# Altium PCB PCB_RPi-ASI-POWER-12.pcbdoc
Units mil, origin at the board's own origin, x right, y up, seen from the top; angles counter-clockwise.
Board outline 4700 x 3750 mil, 2 copper layers (Top Layer, Bottom Layer); 74 components, 57 nets, 225 pads, 21 vias.
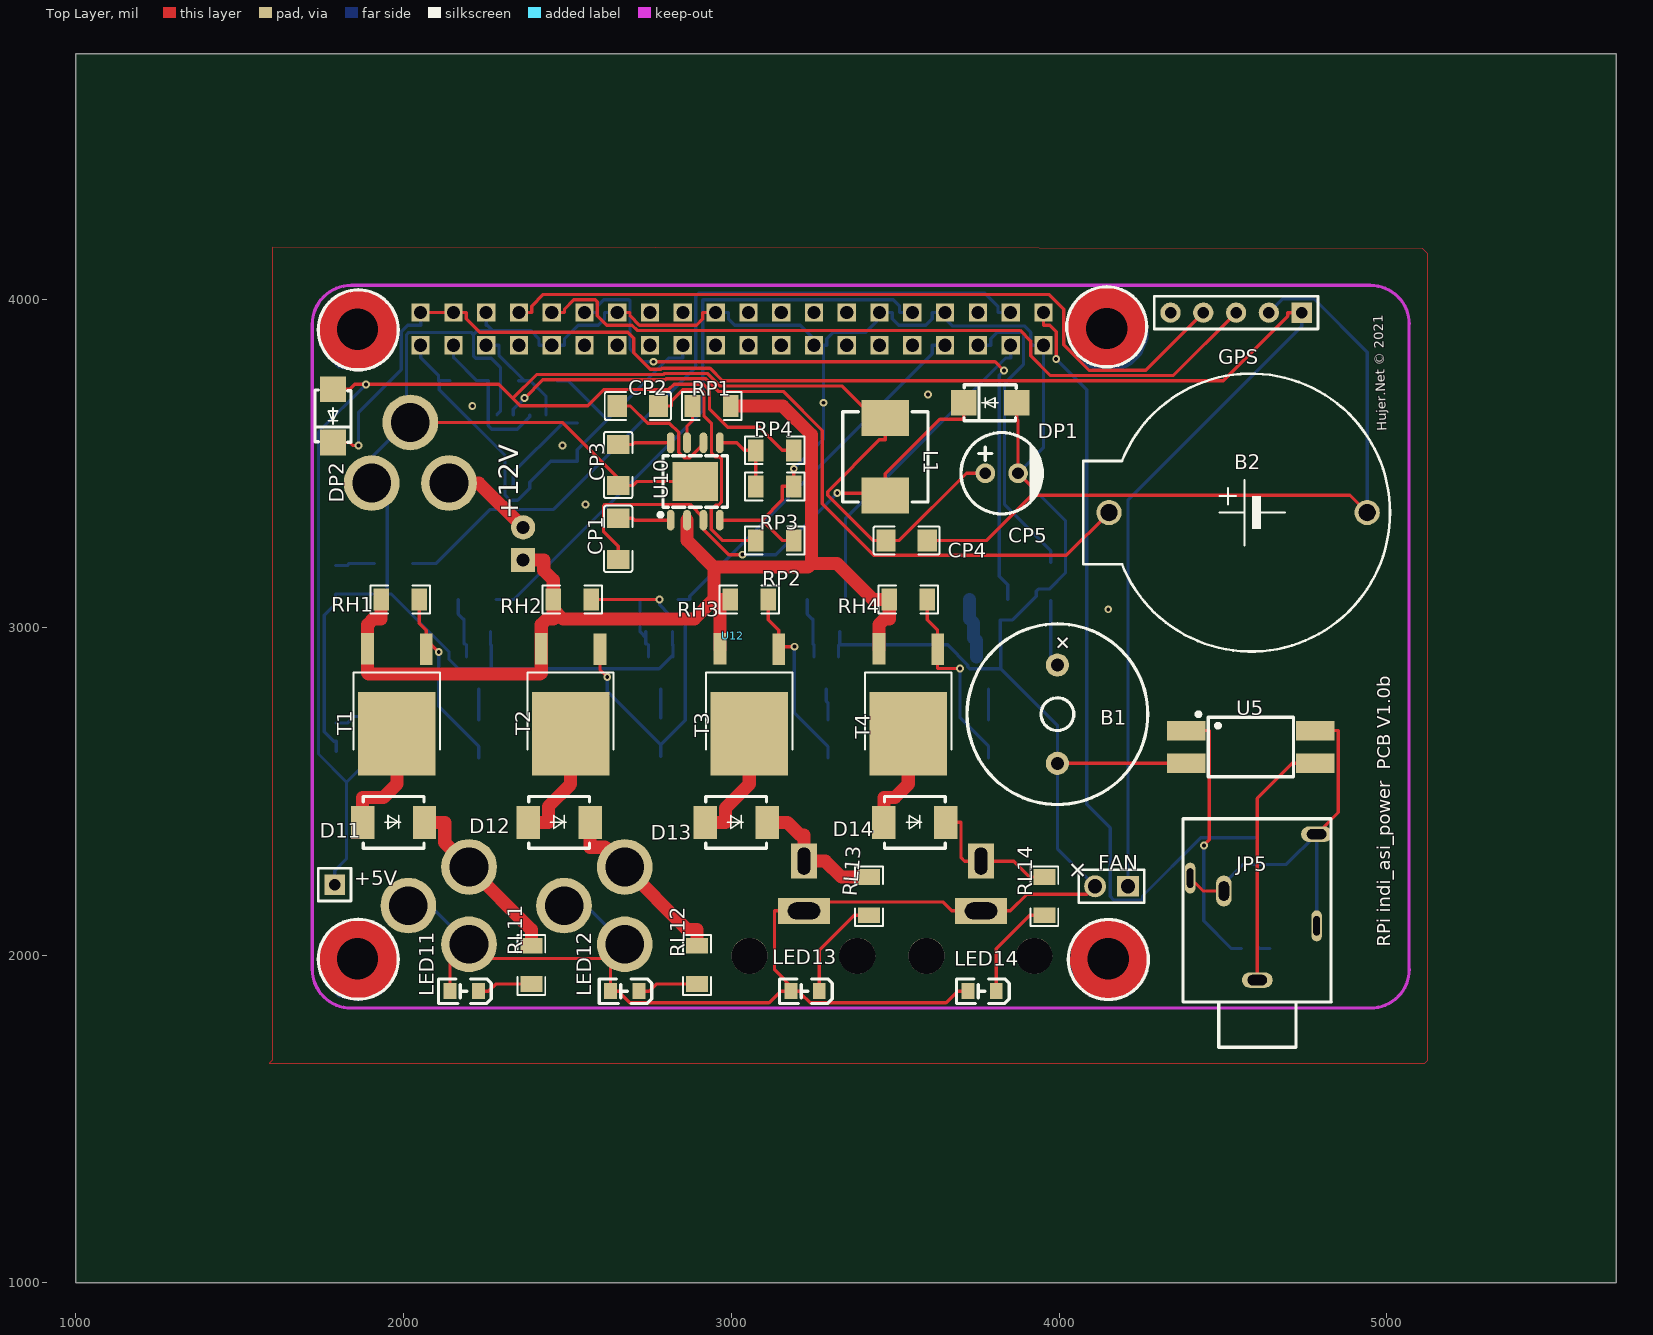
[diagram p0: Top Layer view]
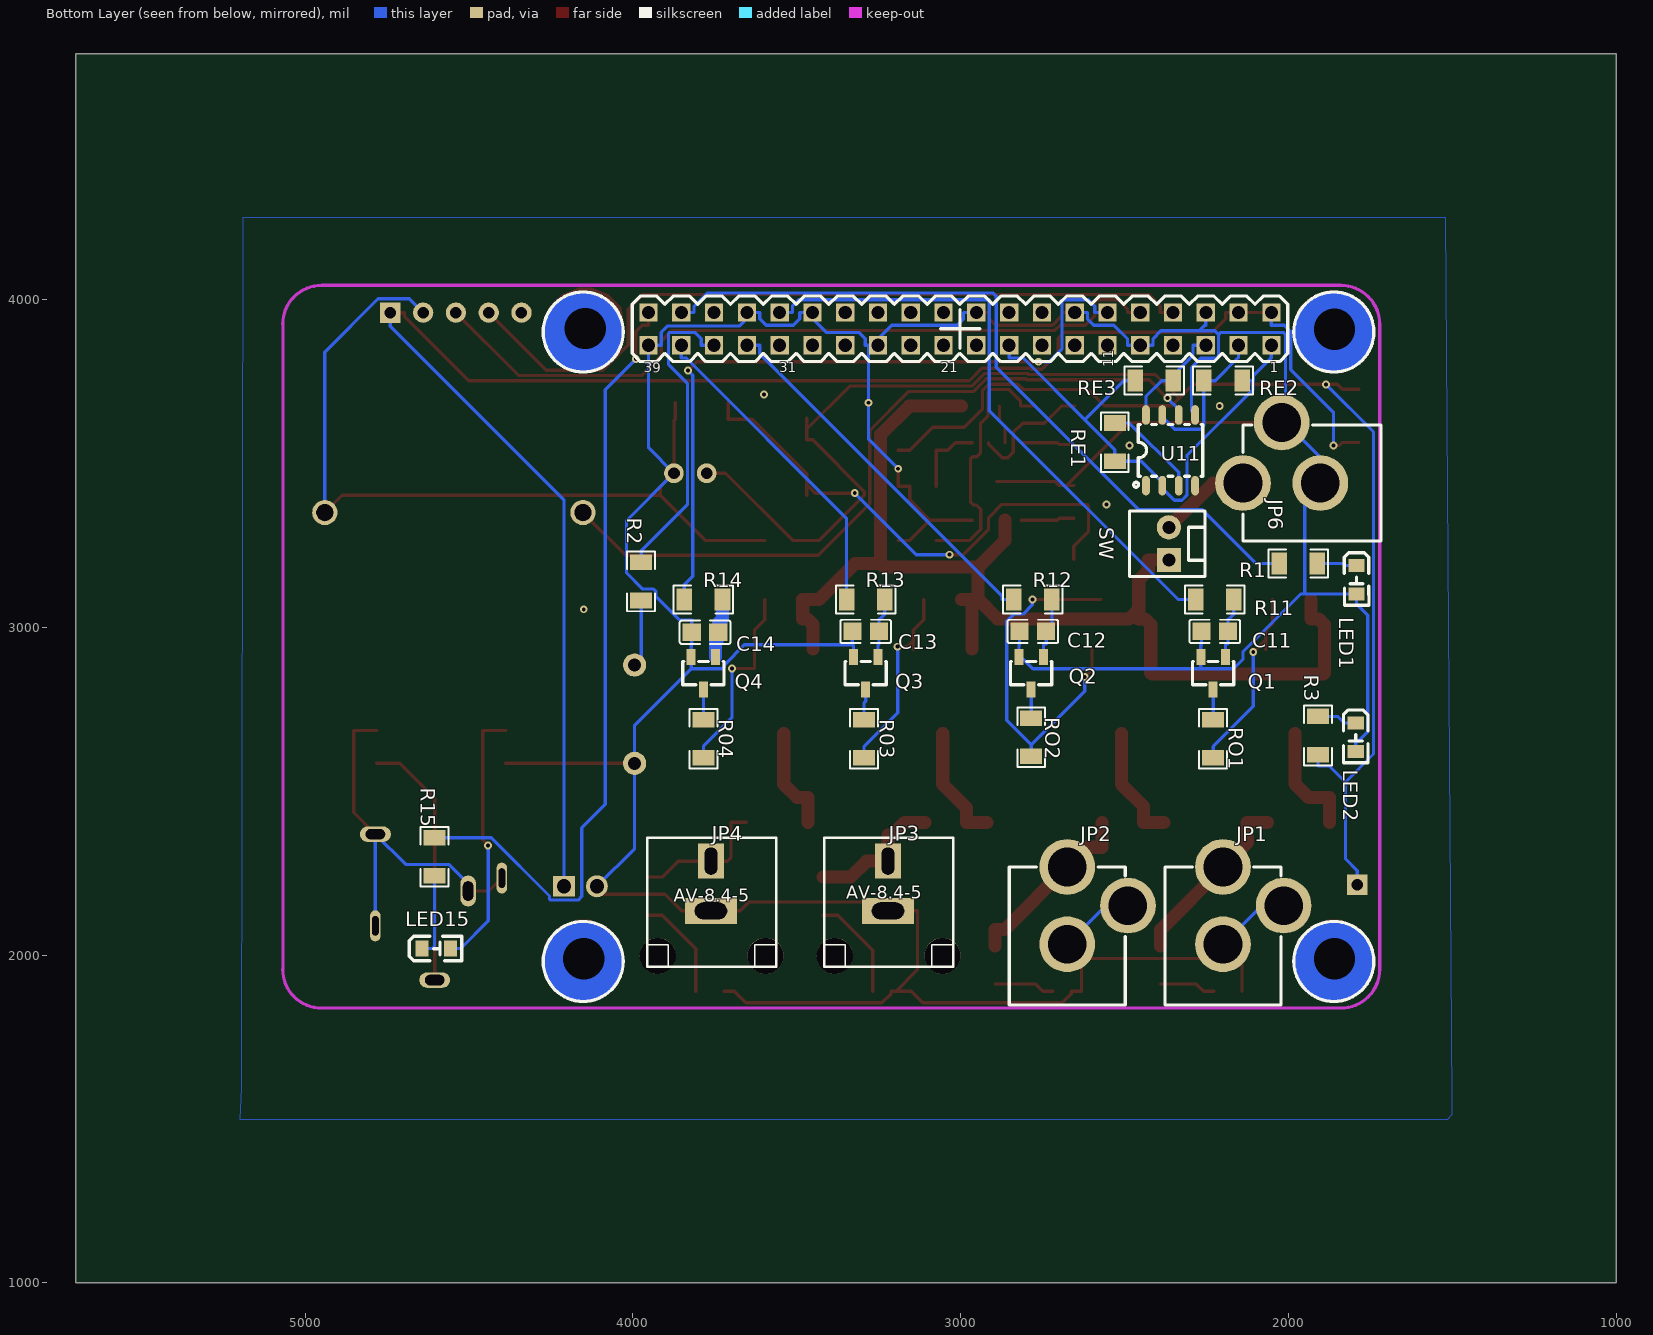
[diagram p1: Bottom Layer view, seen from below]

## Layer stack, top to bottom
Top Layer: signal copper (thickness not stored)
Dielectric: dielectric 12.6, FR-4, Dk 4.8
Bottom Layer: signal copper (thickness not stored)

## Board outline
5700,1000 1000,1000 1000,4750 5700,4750

## Components (designator, comment, footprint, x,y, rotation, side; value= is the part's Value field where it differs from the comment)
+5V "HDR-M-2.54_1x1" HDR-M-2.54_1X1 1790,2215 r0 top
B1 "SFN-1407PA7.6" BUZ-TH_BD14.0-P7.60-D0.7-FD 3995,2735 r270 top
B2 "CR2032-BS-6-1" CR2032 4590,3350 r180 top
C11 "10n" C0805 2225,2987.5 r0 bottom
C12 "10n" C0805 2780,2987.5 r0 bottom
C13 "10n" C0805 3290,2987.5 r0 bottom
C14 "10n" C0805 3780,2985 r0 bottom
CP1 "10n" C1206 2655.01,3270 r90 top
CP2 "3n9" C1206 2715,3675 r180 top
CP3 "100n" C1206 2655,3495 r90 top
CP4 "100n" C1206 3535,3265 r180 top
CP5 "47uF" CAP-D6.3-F2.5 3825,3470 r0 top
D11 "SS54" SMB_L4.6-W3.6-LS5.3-R-RD 1969.97,2405 r180 top
D12 "SS54" SMB_L4.6-W3.6-LS5.3-R-RD 2474.97,2405 r180 top
D13 "SS54" SMB_L4.6-W3.6-LS5.3-R-RD 3014.97,2405 r180 top
D14 "SS54" SMB_L4.6-W3.6-LS5.3-R-RD 3559.97,2405 r180 top
DP1 "SS14_C84343" SMA_L4.3-W2.6-LS5.2-RD 3790,3685 r0 top
DP2 "SS14_C84343" SMA_L4.3-W2.6-LS5.2-RD 1785,3645 r90 top
FAN "Fan" HDR-M-2.54_1X2 4160,2210 r180 top
GPS "GPS" HDR-M-2.54_1X5 4540,3960 r180 top
JP1 "POWER_JACKPTH" POWER_JACK_PTH 2200,1730 r0 bottom
JP2 "POWER_JACKPTH" POWER_JACK_PTH 2675,1730 r0 bottom
JP3 "RCA" AV-8.4-5 3420,1961.78 r0 bottom
JP4 "RCA" AV-8.4-5 3960,1961.78 r0 bottom
JP5 "3.5mm jack Camera Shot Port" AUDIO-PJ324 4400,2235 r180 top
JP6 "POWER_JACKPTH" POWER_JACK_PTH 1600,3440 r270 bottom
L1 "10uH" IND-SMD_L7.0-W6.6 3470.05,3520 r270 top
LED1 "Camera" LED0805-RD#1 1792.53,3145 r90 bottom
LED2 "Camera" LED0805-RD#1 1795.03,2665 r90 bottom
LED11 "LED-TH-3mm_R" LED0805-RD#2 2185.03,1890 r180 top
LED12 "LED-TH-3mm_R" LED0805-RD#2 2675.03,1890 r180 top
LED13 "LED-TH-3mm_R" LED0805-RD#2 3225.03,1890 r180 top
LED14 "LED-TH-3mm_R" LED0805-RD#2 3765.03,1890 r180 top
LED15 "Camera" LED0805-RD#1 4600.03,2020 r0 bottom
Q1 "MMBT2222A-1P" SOT-23-3_L3.0-W1.7-P0.95-LS2.9-BR 2230,2860 r270 bottom
Q2 "MMBT2222A-1P" SOT-23-3_L3.0-W1.7-P0.95-LS2.9-BR 2785,2860 r270 bottom
Q3 "MMBT2222A-1P" SOT-23-3_L3.0-W1.7-P0.95-LS2.9-BR 3290,2860 r270 bottom
Q4 "MMBT2222A-1P" SOT-23-3_L3.0-W1.7-P0.95-LS2.9-BR 3785,2860 r270 bottom
R1 "2k2" R1206#1 1970,3195 r180 bottom
R2 "100" R1206#1 3975,3140 r90 bottom
R03 "100" R1206#1 3295,2660 r90 bottom
R3 "2k2" R1206#1 1910,2670 r90 bottom
R04 "100" R1206#1 3785,2660 r90 bottom
R11 "1k" R1206#1 2225,3085 r0 bottom
R12 "1k" R1206#1 2780,3085 r0 bottom
R13 "1k" R1206#1 3290,3085 r0 bottom
R14 "1k" R1206#1 3785,3085 r0 bottom
R15 "220" R1206#1 4605,2300 r270 bottom
RE1 "4k7" R1206#1 2530,3565 r90 bottom
RE2 "4k7" R1206#1 2200,3752.5 r0 bottom
RE3 "4k7" R1206#1 2410,3752.5 r180 bottom
RH1 "10k" R1206#2 1990,3085 r180 top
RH2 "10k" R1206#2 2515,3085 r180 top
RH3 "10k" R1206#2 3055,3085 r180 top
RH4 "10k" R1206#2 3540,3085 r180 top
RL11 "22k" R1206#2 2390,1970 r90 top
RL12 "22k" R1206#2 2895,1970 r90 top
RL13 "22k" R1206#2 3420,2180 r90 top
RL14 "22k" R1206#2 3955,2180 r90 top
RO1 "100" R1206#1 2230,2660 r90 bottom
RO2 "100" R1206#1 2785,2665 r90 bottom
RP1 "100k" R1206#2 2940,3675 r0 top
RP2 "6k8" R1206#2 3132.5,3265 r180 top
RP3 "10k" R1206#2 3132.5,3430 r180 top
RP4 "47k" R1206#2 3132.5,3540 r0 top
SW "MOLEX KK 1X2" "MOLEX KK 1X2" 2365,3205 r270 bottom
T1 "NPD22P04" TO-252-2_L6.6-W6.1-P4.57-LS9.9-TL-CW_A 1979.96,2805.04 r270 top
T2 "NPD22P04" TO-252-2_L6.6-W6.1-P4.57-LS9.9-TL-CW_A 2509.96,2805.04 r270 top
T3 "NPD22P04" TO-252-2_L6.6-W6.1-P4.57-LS9.9-TL-CW_A 3054.96,2805.04 r270 top
T4 "NPD22P04" TO-252-2_L6.6-W6.1-P4.57-LS9.9-TL-CW_A 3539.96,2805.04 r270 top
U5 "PC817SC" OPTO-SMD-4_L4.6-W6.5-P2.54-LS10.3-TL 4585,2635 r0 top
U10 "MP2307DN-LF-Z" SOP-8_L4.9-W3.9-P1.27-LS6.0-BL-EP 2890,3445 r0 top
U11 "DS3231MZ+" SOIC-8_L4.9-W3.9-P1.27-LS6.0-BL 2360,3540 r0 bottom
U12 "RaspberryPi 3" "RPI3/4 GPIO" 3005,2975 r0 top

## Footprints (in the part's own frame and the unit in brackets; to place one, negate y for a bottom-side part, rotate by r counter-clockwise, add the part's x,y. Pads: shape width x height; smd on the part's side, far side on the other; paste and mask are expansions set on the pad)
AUDIO-PJ324 [mm]
  oval 2.4x1.2 hole 0.8 slot 1.5 at 0 deg: 1(-5.2,7.9) 4(-9.797,-3.399)
  oval 0.8x2.4 hole 0.5 slot 1.5 at 90 deg: 2(0,0) 5(-9.8,3.699)
  oval 1.2x2.4 hole 0.8 slot 1.5 at 90 deg: 3(-2.609,1.001)
  silkscreen extent -10.94,-4.6 0.56,13.1
AV-8.4-5 [mm]
  rect 2x2.7 hole 1 slot 2.1 at 90 deg: 1(-5.032,-8.255)
  rect 4x2 hole 1.3 slot 2.5 at 0 deg: 2(-5.032,-4.4)
  round 2.8 hole 2.8 unplated: ""(-9.255,-0.914) ""(-0.905,-0.914)
  silkscreen extent -10.08,-10.06 -0.08,-0.06
BUZ-TH_BD14.0-P7.60-D0.7-FD [mm]
  round 1.8 hole 1: 1(-3.81,0) 2(3.81,0)
  silkscreen extent -7,-7 7,7
C0805 [mm]
  rect 1.41x1.35 smd: 1(1.03,0) 2(-1.03,0)
  silkscreen extent -1.96,-0.9 1.96,0.9
C1206 [mm]
  rect 1.485x1.728 smd: 1(-1.593,0) 2(1.593,0)
  silkscreen extent -2.56,-1.09 2.56,1.09
CAP-D6.3-F2.5 [mil]
  round 60 hole 36: 1(-50,0) 2(50,0)
  silkscreen extent -124,-124 125,124
CR2032 [mil]
  round 76.77 hole 51.18 slot 51.38 at 90 deg: +(437.4,0) -(-350,0)
  silkscreen extent -420,-424 516,424
HDR-M-2.54_1X1 [mil]
  rect 62x62 hole 35: 1(0,0)
  silkscreen extent -50,-50 50,50
HDR-M-2.54_1X2 [mm]
  rect 1.7x1.575 hole 1.1: 1(-1.27,0)
  round 1.7 hole 1.1: 2(1.27,0)
  silkscreen extent -2.54,-1.27 2.54,1.27
HDR-M-2.54_1X5 [mil]
  rect 62x62 hole 35: 1(-200,0)
  round 62 hole 35: 2(-100,0) 3(0,0) 4(100,0) 5(200,0)
  silkscreen extent -250,-50 250,50
IND-SMD_L7.0-W6.6 [mm]
  rect 2.8x3.7 smd: 1(-3,0) 2(3,0)
  silkscreen extent -3.5,-3.3 3.5,3.3
LED0805-RD#1 [mm]
  rect 1x1.25 smd: 1(1.1,0) 2(-1.1,0)
  silkscreen extent -1.98,-0.96 2.1,0.95
LED0805-RD#2 [mm]
  rect 1x1.25 smd: 1(-1.1,0) 2(1.1,0)
  silkscreen extent -2.1,-0.95 1.98,0.96
"MOLEX KK 1X2" [mil]
  rect 74x74 hole 40: 1(0,0)
  round 74 hole 40: 2(-100,0)
  silkscreen extent -150,-120 50,110
OPTO-SMD-4_L4.6-W6.5-P2.54-LS10.3-TL [mm]
  rect 3x1.5 smd: 1(-5,1.27) 2(-5,-1.27) 3(5,-1.27) 4(5,1.27)
  silkscreen extent -4.21,-2.3 3.3,2.69
POWER_JACK_PTH [mil]
  round 170 hole 118: GND(0,-303) GNDBREAK(-185,-421) PWR(0,-539)
  silkscreen extent -177,-539 177,-118
R1206#1 [mil]
  rect 47.54x66.97 smd: 1(58.22,0) 2(-58.22,0)
  silkscreen extent -91,-42 91,42
R1206#2 [mil]
  rect 47.54x66.97 smd: 1(-58.22,0) 2(58.22,0)
  silkscreen extent -91,-42 91,42
"RPI3/4 GPIO" [mil]
  rect 55.7x55.7 hole 40: 1(-952.68,885.62) 2(-952.68,985.62) 3(-852.68,885.62) 4(-852.68,985.62) 5(-752.68,885.62) 6(-752.68,985.62) 7(-652.68,885.62) 8(-652.68,985.62) 9(-552.68,885.62) 10(-552.68,985.62) 11(-452.68,885.62) 12(-452.68,985.62) 13(-352.68,885.62) 14(-352.68,985.62) 15(-252.68,885.62) 16(-252.68,985.62) 17(-152.68,885.62) 18(-152.68,985.62) 19(-52.68,885.62) 20(-52.68,985.62) 21(47.32,885.62) 22(47.32,985.62) 23(147.32,885.62) 24(147.32,985.62) 25(247.32,885.62) 26(247.32,985.62) 27(347.32,885.62) 28(347.32,985.62) 29(447.32,885.62) 30(447.32,985.62) 31(547.32,885.62) 32(547.32,985.62) 33(647.32,885.62) 34(647.32,985.62) 35(747.32,885.62) 36(747.32,985.62) 37(847.32,885.62) 38(847.32,985.62) 39(947.32,885.62) 40(947.32,985.62)
  round 60 hole 125.98: 155(-1145,-985.62) 155(-1145,934.38) 155(1140.32,936.62) 155(1145,-985.62)
  Top Layer region: -1133,812.38 -1093,822.38 -1073,832.38 -1043,862.38 -1023,912.38 -1023,942.38 -1033,992.38 -1073,1032.38 -1123,1052.38 -1163,1052.38 -1213,1032.38 -1253,992.38 -1263,922.38 -1243,862.38 -1203,822.38 -1153,812.38 -1143,812.38
  Top Layer region: 1150.32,821.62 1190.32,831.62 1210.32,841.62 1240.32,871.62 1260.32,921.62 1260.32,951.62 1250.32,1001.62 1210.32,1041.62 1160.32,1061.62 1120.32,1061.62 1070.32,1041.62 1030.32,1001.62 1020.32,931.62 1040.32,871.62 1080.32,831.62 1130.32,821.62 1140.32,821.62
  Top Layer region: 1157,-1107.62 1197,-1097.62 1217,-1087.62 1247,-1057.62 1267,-1007.62 1267,-977.62 1257,-927.62 1217,-887.62 1167,-867.62 1127,-867.62 1077,-887.62 1037,-927.62 1027,-997.62 1047,-1057.62 1087,-1097.62 1137,-1107.62 1147,-1107.62
  Top Layer region: -1133,-1107.62 -1093,-1097.62 -1073,-1087.62 -1043,-1057.62 -1023,-1007.62 -1023,-977.62 -1033,-927.62 -1073,-887.62 -1123,-867.62 -1163,-867.62 -1213,-887.62 -1253,-927.62 -1263,-997.62 -1243,-1057.62 -1203,-1097.62 -1153,-1107.62 -1143,-1107.62
  Bottom Layer region: -1133.25,805.79 -1093.25,815.79 -1073.25,825.79 -1043.25,855.79 -1023.25,905.79 -1023.25,935.79 -1033.25,985.79 -1073.25,1025.79 -1123.25,1045.79 -1163.25,1045.79 -1213.25,1025.79 -1253.25,985.79 -1263.25,915.79 -1243.25,855.79 -1203.25,815.79 -1153.25,805.79 -1143.25,805.79
  Bottom Layer region: -1133.25,-1114.21 -1093.25,-1104.21 -1073.25,-1094.21 -1043.25,-1064.21 -1023.25,-1014.21 -1023.25,-984.21 -1033.25,-934.21 -1073.25,-894.21 -1123.25,-874.21 -1163.25,-874.21 -1213.25,-894.21 -1253.25,-934.21 -1263.25,-1004.21 -1243.25,-1064.21 -1203.25,-1104.21 -1153.25,-1114.21 -1143.25,-1114.21
  Bottom Layer region: 1156.75,805.79 1196.75,815.79 1216.75,825.79 1246.75,855.79 1266.75,905.79 1266.75,935.79 1256.75,985.79 1216.75,1025.79 1166.75,1045.79 1126.75,1045.79 1076.75,1025.79 1036.75,985.79 1026.75,915.79 1046.75,855.79 1086.75,815.79 1136.75,805.79 1146.75,805.79
  Bottom Layer region: 1156.75,-1114.21 1196.75,-1104.21 1216.75,-1094.21 1246.75,-1064.21 1266.75,-1014.21 1266.75,-984.21 1256.75,-934.21 1216.75,-894.21 1166.75,-874.21 1126.75,-874.21 1076.75,-894.21 1036.75,-934.21 1026.75,-1004.21 1046.75,-1064.21 1086.75,-1104.21 1136.75,-1114.21 1146.75,-1114.21
  silkscreen extent -1265,-1110 1267,1064
SMA_L4.3-W2.6-LS5.2-RD [mm]
  rect 2x2 smd: 1(-2.057,0) 2(2.057,0)
  silkscreen extent -2.03,-1.4 2.01,1.4
SMB_L4.6-W3.6-LS5.3-R-RD [mm]
  rect 1.8x2.54 smd: 1(2.4,0) 2(-2.4,0)
  silkscreen extent -2.35,-2 2.35,2
SOIC-8_L4.9-W3.9-P1.27-LS6.0-BL [mm]
  oval 0.6x1.52 smd: 1(1.905,2.74) 2(0.635,2.74) 3(-0.635,2.74) 4(-1.905,2.74) 5(-1.905,-2.74) 6(-0.635,-2.74) 7(0.635,-2.74) 8(1.905,-2.74)
  silkscreen extent -2.5,-2 2.86,2.86
SOP-8_L4.9-W3.9-P1.27-LS6.0-BL-EP [mm]
  oval 0.6x1.6 smd: 1(-1.905,-3) 2(-0.635,-3) 3(0.635,-3) 4(1.905,-3) 5(1.905,3) 6(0.635,3) 7(-0.635,3) 8(-1.905,3)
  rect 3.5x3 smd: 9(0,0)
  silkscreen extent -2.84,-2.74 2.5,2
SOT-23-3_L3.0-W1.7-P0.95-LS2.9-BR [mm]
  rect 1.25x0.7 smd: 1(-1.25,0.95) 2(-1.25,-0.95) 3(1.25,0)
  silkscreen extent -0.9,-1.6 0.9,1.6
TO-252-2_L6.6-W6.1-P4.57-LS9.9-TL-CW_A [mm]
  rect 2.409x0.979 smd: 1(-3.251,2.273) 3(-3.292,-2.273)
  rect 6.5x6 smd: 2(3.292,0)
  silkscreen extent -1.46,-3.35 4.51,3.34

## Via types
v1: diameter 24.02, hole 12.01, Top Layer to Bottom Layer, 21 vias

## Nets (pads, with @x,y where several pads share a name; then routed paths per layer and width w, separated by ;. In a path a pad name is that pad's centre, name@x,y a point inside that pad or via, vN(x,y) a via of type N, cw(c..) or ccw(c..) an arc to the next point about the centre after c; other vN are vias at no path point)
3V3: RE1.2 RE2.2 RE3.2 U11.2 U12.1 U12.17 | length 1600
  Bottom Layer w10: U12.1 2052.32,3821.7 2106.94,3767.08 2106.94,3752.5 2109.48,3752.5 ; RE2.2 2109.48,3752.5 ; RE3.2 2503.06,3752.5 2621.97,3633.59 ; U12.17 2852.32,3821.7 2810.08,3821.7 2621.97,3633.59 ; 2109.48,3752.5 2109.48,3724.69 2310,3524.17 2310,3402.42 2324.97,3387.45 2348.1,3387.45 2385,3424.35 U11.2 2385,3442.38 2449.4,3506.78 RE1.2 2530,3541.62 2621.97,3633.59
12V: RH1.2 RH2.2 RH3.2 RH4.2 RP1.2 SW.1 T1.3 T2.3 T3.3 T4.3 U10.2 | length 3667.6
  Top Layer w40: RH1.2 1931.78,3025.53 1907.96,3025.53 1890.48,3008.05 1890.48,2971.35 T1.3 1890.48,2861.23 1893.94,2857.77 2417.02,2857.77 2420.48,2861.23 T2.3 2420.48,3008.05 2437.96,3025.53 2456.78,3025.53 RH2.2@2456.78,3055.27 ; SW.1 2427.99,3205 2427.99,3173.26 2456.78,3144.47 RH2.2 RH2.2@2456.78,3055.27 ; U10.2 2865,3265.46 2947.02,3183.44 ; T3.3 2965.48,3085 ; RH3.2 2965.48,3085 ; RP1.2 3157.25,3675 3244.64,3587.61 3244.64,3194.24 ; T4.3 3450.48,3008.05 3467.96,3025.53 3481.78,3025.53 RH4.2 3432.02,3085 3322.78,3194.24 3244.64,3194.24 ; RH2.2@2456.78,3055.27 2486.58,3025.47 2887.49,3025.47 2947.02,3085 ; 2947.02,3085 2965.48,3085 ; 2947.02,3085 2947.02,3183.44 ; 2947.02,3183.44 3233.84,3183.44 3244.64,3194.24
+5V: DP2.1 FAN.1 GPS.1 U12.2 U12.4 | length 5464.5
  Top Layer w10: DP2.1 1835.44,3564 1844.49,3554.95 v1(1862.99,3554.95) ; U12.2 U12.4 2191.24,3960.62 2191.24,3941.16 2232.17,3900.23 2684.07,3900.23 2702.65,3881.65 2702.65,3837.04 2752.68,3787.01 2785.15,3787.01 2788.21,3790.07 2935.27,3790.07 2973.22,3752.12 4500.57,3752.12 4697.93,3949.48 4697.93,3960 GPS.1
  Bottom Layer w10: v1(1862.99,3554.95) 1862.99,3656.22 1993.16,3786.39 1993.16,3901.46 2013.4,3921.7 2052.32,3921.7 U12.2 ; FAN.1 4210,3387.93 4740,3917.93 GPS.1
B1_1: B1.1 R2.2 | length 205.1
  Bottom Layer w10: R2.2 3975,2905.01 B1.1
B2_+: B2.+ U11.6 | length 2281.1
  Top Layer w10: v1(2369.46,3699.35) 2424.94,3754.83 2798.49,3754.83 2801.55,3757.89 2921.93,3757.89 2960.26,3719.56 3158.73,3719.56 3277.88,3600.41 3277.88,3376.57 3434.68,3219.77 4022.37,3219.77 B2.+
  Bottom Layer w10: U11.6 2335,3664.89 v1(2369.46,3699.35)
CP1_1: CP1.1 DP1.1 L1.2 U10.3 | length 1640.4
  Top Layer w10: CP1.1 2655.01,3247.61 2609.91,3292.71 2609.91,3370.08 2614.7,3374.87 2874.28,3374.87 2915,3334.15 U10.3 2915,3299.47 2992.97,3221.5 v1(3034.14,3221.5) ; v1(3323.39,3409.24) 3444.3,3409.24 L1.2@3470.05,3434.99 ; L1.2 L1.2@3470.05,3434.99 ; DP1.1 3709,3634.56 3636.53,3634.56 3470.05,3468.08 L1.2@3470.05,3434.99
  Bottom Layer w10: v1(3034.14,3221.5) 3135.65,3221.5 v1(3323.39,3409.24)
CP1_2: CP1.2 U10.1 | length 162.4
  Top Layer w10: CP1.2 2700.09,3332.7 2705.9,3326.89 U10.1
CP2_2: CP2.2 U10.6 | length 385
  Top Layer w10: CP2.2 2692.61,3675 2744.68,3622.93 2811.46,3622.93 2840,3594.39 2840,3534.04 2856.79,3517.25 2873.59,3517.25 2915,3558.66 U10.6
CP3_2: CP3.2 U10.8 | length 162.2
  Top Layer w10: CP3.2 2700.09,3557.7 2705.5,3563.11 U10.8
D11_2: D11.2 JP1.PWR RL11.2 | length 547.6
  Top Layer w40: D11.2 2125.89,2405 2125.89,2343.11 JP1.PWR 2200,2267.98 2390,2077.98 RL11.2
D12_2: D12.2 JP2.PWR RL12.2 | length 555.3
  Top Layer w40: D12.2 2569.46,2329.01 2614.99,2329.01 JP2.PWR 2866.02,2077.98 2895,2077.98 RL12.2
D14_1: D14.1 T4.2 | length 321.2
  Top Layer w40: D14.1 3465.49,2480.99 3499.45,2480.99 3539.96,2521.5 T4.2
GND: B1.2 B2.- C11.1 C12.1 C13.1 C14.1 CP3.1 CP4.1 CP5.2 DP1.2 FAN.2 GPS.2 JP1.GND JP1.GNDBREAK JP2.GND JP2.GNDBREAK JP3.2 JP4.2 JP6.GND JP6.GNDBREAK LED1.2 LED2.2 LED11.2 LED12.2 LED13.2 LED14.2 Q1.2 Q2.2 Q3.2 Q4.2 RP2.1 RP3.1 U5.2 U10.4 U10.9 U11.5 U12.6 U12.9 U12.14 U12.20 U12.25 U12.30 U12.34 U12.39 | length 16682.5
  Top Layer w10: JP6.GNDBREAK 2484.85,3625 CP3.1@2677.55,3432.3 ; LED11.2 2141.72,1974.72 JP1.GND 2243.28,1989.72 JP2.GND@2631.72,1989.72 ; U12.14 2691.24,3960.62 2691.24,3950.35 2719.89,3921.7 2893.95,3921.7 2913.4,3941.15 2913.4,3960.62 U12.20 ; CP3.1 CP3.1@2677.55,3432.3 ; JP2.GND JP2.GND@2631.72,1989.72 ; U10.9 2712.79,3445 2700.09,3432.3 CP3.1@2677.55,3432.3 ; U10.4 3093.99,3326.89 ; RP2.1 3173.3,3265 3155.88,3265 3093.99,3326.89 ; v1(3190.72,3483.81) RP3.1 3155.88,3430 3155.88,3388.78 3093.99,3326.89 ; JP3.2 JP3.2@3176.99,2135 ; CP4.1 3779.36,3265 3916.86,3402.5 ; LED14.2 3690.97,1889.99 3655.29,1854.31 3240.47,1854.31 3212.48,1882.3 3212.48,1889.99 LED13.2@3197.1,1889.99 ; DP1.2 3871,3634.56 3875,3630.56 CP5.2 3916.86,3428.14 3916.86,3402.5 ; B1.2 U5.2 ; FAN.2 4085.45,2185.45 3902.15,2185.45 3851.7,2135 JP4.2 3672.08,2135 3644.8,2162.28 3204.27,2162.28 JP3.2@3176.99,2135 ; B2.- 4887.5,3402.5 3916.86,3402.5 ; JP2.GND@2631.72,1989.72 LED12.2 2662.48,1889.99 2662.48,1882.3 2690.47,1854.31 3115.29,1854.31 3150.97,1889.99 LED13.2 3189.41,1889.99 LED13.2@3197.1,1889.99 ; JP3.2@3176.99,2135 3132.08,2135 3132.08,1955.01 LED13.2@3197.1,1889.99
  Bottom Layer w10: LED2.2 1795.03,2652.44 1787.34,2652.44 1758.1,2681.68 1758.1,3036.5 1792.53,3070.93 LED1.2 1828.2,3101.69 1950.52,3101.69 ; JP1.GNDBREAK 2082,2151 JP1.GND ; JP6.GNDBREAK JP6.GNDBREAK@2009.26,3625 ; U12.6 2252.32,3921.7 2255.73,3921.7 2273.08,3904.35 ; C11.1 2265.55,2946.73 2267.4,2944.88 Q1.2 2267.4,2873.52 ; U11.5 2295.76,3658.63 2295.76,3792.9 2267.53,3821.13 2220.46,3821.13 2213.4,3828.19 2213.4,3893.05 ; JP2.GNDBREAK 2557,2151 JP2.GND ; U12.14 2613.4,3960.62 2613.4,3941.15 2593.95,3921.7 2532.85,3921.7 2491.24,3880.09 2491.24,3860.62 2471.78,3860.62 U12.9 2413.4,3860.62 2413.4,3880.08 2389.13,3904.35 2273.08,3904.35 ; C12.1 2820.55,2946.73 2822.4,2944.88 2822.4,2927.04 Q2.2@2822.4,2916.1 ; Q2.2 Q2.2@2822.4,2916.1 ; U12.20 2991.24,3960.62 2991.24,3941.15 3010.69,3921.7 3210.7,3921.7 U12.25@3271.78,3860.62 ; v1(3190.72,3483.81) 3281.51,3574.6 3281.51,3860.62 ; U12.25 U12.25@3271.78,3860.62 ; Q3.2 3327.4,2944.88 3328.98,2946.46 3330.55,2946.46 ; C13.1 3330.55,2946.46 ; U12.30 U12.30@3471.78,3960.62 ; U12.34 U12.34@3632.86,3960.62 ; FAN.2 3995,2325 B1.2 3995,2700.92 3822.4,2873.52 ; GPS.2 4682.08,4002.08 4777.64,4002.08 4940,3839.72 B2.- ; 1950.52,3101.69 1963.23,3101.69 2138.93,2925.99 2138.93,2902.46 2167.87,2873.52 2267.4,2873.52 ; 1950.52,3101.69 1950.52,3392.48 JP6.GND 1903,3518.74 JP6.GNDBREAK@2009.26,3625 ; JP6.GNDBREAK@2009.26,3625 2009.26,3893.17 2015.64,3899.55 2206.9,3899.55 2213.4,3893.05 ; 2213.4,3893.05 2224.7,3904.35 2273.08,3904.35 ; 2267.4,2873.52 2779.82,2873.52 Q2.2@2822.4,2916.1 ; U12.25@3271.78,3860.62 3281.51,3860.62 ; 3281.51,3860.62 3291.24,3860.62 3291.24,3880.09 3310.69,3899.54 3410.7,3899.54 U12.30@3471.78,3960.62 ; 3330.55,2946.46 3660.33,2946.46 3721.82,2884.97 3721.82,2879.45 3727.75,2873.52 3822.4,2873.52 ; U12.30@3471.78,3960.62 3491.24,3960.62 3491.24,3941.15 3510.69,3921.7 3593.94,3921.7 3613.4,3941.16 3613.4,3960.62 U12.34@3632.86,3960.62 ; U12.34@3632.86,3960.62 3674.07,3919.41 3893.53,3919.41 3913.4,3899.54 3913.4,3860.62 U12.39 3952.32,3547.32 CP5.2 4019.56,3325.44 4019.56,3166.3 3969.88,3116.62 3936.94,3116.62 3930.44,3110.12 3930.44,3094.89 3858.2,3022.65 3820.55,3022.65 C14.1 3820.55,2947.36 3822.4,2945.51 Q4.2 3822.4,2873.52
  other v1: 4150,3055 2555,3375 2485,3555 2210,3675 3281.51,3685 3600,3710
GPIO12: R11.1 U12.32 | length 1873.4
  Bottom Layer w10: R11.1 2337.2,3085 2912.92,3660.72 2912.92,3998.69 2913.77,3999.54 3493.95,3999.54 3513.4,3980.09 3513.4,3960.62 U12.32
GPIO13: R12.1 U12.33 | length 1156
  Bottom Layer w10: R12.1 2873.06,3085 2873.06,3094.83 3613.4,3835.17 3613.4,3860.62 U12.33
GPIO18: R14.1 U12.12 | length 2198
  Top Layer w10: v1(2763.02,3810.09) 3804.87,3810.09 v1(3832,3782.96)
  Bottom Layer w10: U12.12 2591.24,3960.62 2591.24,3980.08 2610.71,3999.55 2688.32,3999.55 2691.25,3996.62 2691.25,3848.96 2730.12,3810.09 v1(2763.02,3810.09) ; v1(3832,3782.96) 3817.6,3768.56 3817.6,3155.17 3843.22,3129.55 R14.1
GPIO19: R2.1 U12.35 | length 948.4
  Bottom Layer w10: U12.35 3791.24,3860.62 3791.24,3880.08 3810.71,3899.55 3888.32,3899.55 3891.25,3896.62 3891.25,3801.67 3833.7,3744.12 3833.7,3374.36 3975,3233.06 R2.1
GPIO20: R1.2 U12.38 | length 2328.5
  Bottom Layer w10: R1.2 2100.38,3195 2265.11,3359.73 2457.8,3359.73 2891.25,3793.18 2891.25,4010.06 2900.74,4019.55 3773.93,4019.55 3813.4,3980.08 3813.4,3960.62 U12.38
GPIO21: R15.2 U12.40 | length 2415.3
  Top Layer w10: U12.40 3952.32,3921.7 3971.78,3921.7 3991.25,3902.23 v1(3991.25,3818.28)
  Bottom Layer w10: v1(3991.25,3818.28) 4084.27,3725.26 4084.27,2459.63 4155.82,2388.08 4155.82,2179.25 4167.15,2167.92 4251.6,2167.92 4254.53,2170.85 4254.53,2180.39 4432.36,2358.22 R15.2
GPIO26: R13.1 U12.37 | length 992.8
  Bottom Layer w10: R13.1 3348.22,3331.82 3838.1,3821.7 3852.32,3821.7 U12.37
JP3_1: D13.2 JP3.1 RL13.2 | length 426
  Top Layer w40: D13.2 3170.89,2405 3209.97,2365.92 3221.89,2365.92 JP3.1 3287.25,2286.78 3335.81,2238.22 RL13.2
JP6_PWR: JP6.PWR SW.2 | length 281.9
  Top Layer w40: JP6.PWR 2230,3440 SW.2
LED1_1: LED1.1 R1.1 | length 122
  Bottom Layer w10: LED1.1 1828.2,3188.31 1834.89,3195 R1.1
LED12_1: LED12.1 RL12.1 | length 185.7
  Top Layer w10: LED12.1 2749.1,1889.99 2770.89,1911.78 RL12.1
LED13_1: LED13.1 RL13.1 | length 320.7
  Top Layer w10: LED13.1 3268.34,2014.67 3375.45,2121.78 RL13.1
LED15_2: LED15.2 U5.1 | length 807.7
  Top Layer w10: U5.1 4458.28,2685 4458.28,2351.5 v1(4441.69,2334.91)
  Bottom Layer w10: v1(4441.69,2334.91) 4441.69,2104.28 4525.97,2020 LED15.2
R03_1: Q3.3 R03.1 | length 94.7
  Bottom Layer w10: Q3.3 3290,2775.12 3295,2770.12 R03.1
R3_1: LED2.1 R3.1 | length 123.2
  Bottom Layer w10: LED2.1 1830.7,2708.31 1850.61,2728.22 R3.1
R04_1: Q4.3 R04.1 | length 92.6
  Bottom Layer w10: R04.1 Q4.3
R04_2: R04.2 RH4.1 T4.1 | length 600.7
  Top Layer w10: RH4.1 3598.22,3022.75 3629.44,2991.53 T4.1 3629.44,2874.55 v1(3697.9,2874.55)
  Bottom Layer w10: v1(3697.9,2874.55) 3697.9,2723.72 3785,2636.62 R04.2
R11_2: C11.2 Q1.1 R11.2 | length 189.7
  Bottom Layer w10: R11.2 2166.78,3040.45 2182.08,3025.15 2184.45,3025.15 C11.2 2184.45,2968.68 2184.45,2949.86 2187.62,2949.86 2192.6,2944.88 Q1.1
R12_2: C12.2 Q2.1 R12.2 | length 207.2
  Bottom Layer w10: R12.2 2721.78,2986.35 C12.2@2739.45,2968.68 ; C12.2 C12.2@2739.45,2968.68 ; Q2.1 2747.6,2944.88 2742.62,2949.86 2739.45,2949.86 C12.2@2739.45,2968.68
R13_2: C13.2 Q3.1 R13.2 | length 185.8
  Bottom Layer w10: R13.2 3231.78,3040.45 3247.08,3025.15 3249.45,3025.15 C13.2 3249.45,2948.03 3252.6,2944.88 Q3.1
R14_2: C14.2 Q4.1 R14.2 | length 184.4
  Bottom Layer w40: R14.2 3726.78,3025.53 3739.45,3012.86 C14.2 3739.45,2967.95 3747.6,2959.8 Q4.1
R15_1: LED15.1 R15.1 | length 255.7
  Bottom Layer w10: R15.1 4605,2027.59 4612.59,2020 LED15.1
RE1_1: RE1.1 U11.3 | length 298
  Bottom Layer w10: U11.3 2335,3472.77 2485.45,3623.22 RE1.1
RL11_1: LED11.1 RL11.1 | length 170.7
  Top Layer w10: LED11.1 2259.1,1889.99 2280.89,1911.78 RL11.1
RL14_1: LED14.1 RL14.1 | length 318.6
  Top Layer w10: LED14.1 3808.34,2019.67 3910.45,2121.78 RL14.1
RL14_2: D14.2 JP4.1 RL14.2 | length 432.7
  Top Layer w10: D14.2 3700.97,2405 3700.97,2297.26 3711.45,2286.78 JP4.1 3861.89,2286.78 3910.45,2238.22 RL14.2
RO1_1: Q1.3 RO1.1 | length 92.6
  Bottom Layer w10: RO1.1 Q1.3
RO2_1: Q2.3 RO2.1 | length 87.6
  Bottom Layer w10: RO2.1 Q2.3
RP1_1: RP1.1 U10.7 | length 118.8
  Top Layer w10: U10.7 2865,3613.67 2881.78,3630.45 RP1.1
RP2_2: CP2.1 RP2.2 | length 789.4
  Top Layer w10: CP2.1 2818,3675 2818,3690.84 2852.87,3725.71 2908.59,3725.71 2916.63,3717.67 2916.63,3645 2940,3621.63 2940,3531.49 2950.95,3520.54 2963.48,3520.54 2969.97,3514.05 2969.97,3381.15 2961.93,3373.11 2952.01,3373.11 2938.68,3359.78 2938.68,3298.55 2972.23,3265 RP2.2
RP4_1: RP3.2 RP4.1 U10.5 | length 228.9
  Top Layer w10: U10.5 3016.33,3563.11 3039.44,3540 RP4.1 RP3.2
RXD: GPS.3 U12.10 | length 2336.5
  Top Layer w10: U12.10 2491.24,3960.62 2491.24,3970.89 2519.89,3999.54 2584.75,3999.54 2591.24,3993.05 2591.24,3950.28 2619.82,3921.7 2697.13,3921.7 2713.22,3905.61 3881,3905.61 3913.4,3873.21 3913.4,3828.19 3973.37,3768.22 4348.22,3768.22 GPS.3
SCL: RE3.1 U11.8 U12.5 | length 338.8
  Bottom Layer w10: U12.5 2291.24,3860.62 2291.24,3830.46 RE3.1@2369.2,3752.5 ; RE3.1 RE3.1@2369.2,3752.5 ; U11.8 2435,3704.12 2386.62,3752.5 RE3.1@2369.2,3752.5
SDA: RE2.1 U11.7 U12.3 | length 463.2
  Bottom Layer w10: U12.3 2152.32,3821.7 2154.18,3821.7 2223.38,3752.5 RE2.1 2258.22,3615.58 2269.6,3604.2 2346.75,3604.2 2385,3642.45 U11.7
T1_1: RH1.1 RO1.2 T1.1 | length 587.8
  Top Layer w10: RH1.1 2048.22,3012.75 2069.44,2991.53 T1.1@2069.44,2962.29 ; T1.1 T1.1@2069.44,2962.29 ; v1(2107.57,2924.17) T1.1@2069.44,2962.29
  Bottom Layer w10: v1(2107.57,2924.17) 2107.57,2759.05 2230,2636.62 RO1.2
T1_2: D11.1 T1.2 | length 351.2
  Top Layer w40: D11.1 1875.49,2480.99 1939.45,2480.99 1979.96,2521.5 T1.2
T2_1: RH2.1 RO2.2 T2.1 | length 1134.2
  Top Layer w10: RH2.1 v1(2781.6,3085) ; T2.1 2599.44,2870.89 v1(2621.7,2848.63)
  Bottom Layer w10: v1(2621.7,2848.63) 2621.7,2804.92 2785,2641.62 ; v1(2781.6,3085) 2781.6,3068.72 2809.88,3040.44 2837.74,3040.44 2859.39,3018.79 2859.39,2716.01 2785,2641.62 ; RO2.2 2785,2641.62
T2_2: D12.1 T2.2 | length 360
  Top Layer w40: D12.1 2441.91,2405 2441.91,2453.45 2509.96,2521.5 T2.2
T3_1: R03.2 RH3.1 T3.1 | length 602
  Top Layer w10: RH3.1 3113.22,3022.75 3144.44,2991.53 3144.44,2962.29 T3.1@3144.44,2959.11 ; T3.1 T3.1@3144.44,2959.11 ; v1(3192.45,2940.84) 3162.71,2940.84 T3.1@3144.44,2959.11
  Bottom Layer w10: v1(3192.45,2940.84) 3192.45,2739.17 3295,2636.62 R03.2
T3_2: D13.1 T3.2 | length 362.1
  Top Layer w40: D13.1 2981.91,2405 2981.91,2448.45 3054.96,2521.5 T3.2
TXD: GPS.4 U12.8 | length 2354.3
  Top Layer w10: U12.8 2391.24,3960.62 2391.24,3980.09 2426.78,4015.63 3968.9,4015.63 4014.24,3970.29 4014.24,3861.34 4091.27,3784.31 4264.31,3784.31 GPS.4
U5_3: JP5.1 U5.3 | length 775.5
  Top Layer w10: JP5.1 4604.72,2477.99 4711.73,2585 U5.3@4781.85,2585
U5_4: JP5.2 JP5.3 JP5.4 JP5.5 U5.4 | length 1179.9
  Top Layer w10: JP5.2 4439.41,2195.58 JP5.3 ; U5.4@4781.85,2685 4851.98,2685 4851.98,2435.07 JP5.4
  Bottom Layer w10: JP5.3 4502.72,2217.54 4561.81,2276.63 4693.54,2276.63 JP5.4 4785.72,2089.45 JP5.5
VCC: +5V.1 CP4.2 CP5.1 DP2.2 L1.1 R3.2 RP4.2 | length 5538.6
  Top Layer w10: DP2.2 1835.44,3726 1850.68,3741.24 v1(1886.04,3741.24) 2291.31,3741.24 2333.72,3698.84 ; RP4.2 3155.88,3540 3085.35,3610.53 2989.2,3610.53 2933.51,3666.22 2933.51,3723.55 2915.26,3741.8 2825.82,3741.8 2809.73,3725.71 2612.58,3725.71 2562.81,3675.94 2356.61,3675.94 2333.72,3698.84 ; L1.1 L1.1@3470.05,3605.02 ; CP5.1 3717.61,3470 3512.61,3265 3492.46,3265 CP4.2 3432,3265 3293.97,3403.03 3293.97,3414.19 3451.7,3571.92 3470.05,3571.92 L1.1@3470.05,3605.02 ; 2333.72,3698.84 2405.8,3770.92 2791.82,3770.92 2794.88,3773.98 2928.6,3773.98 2966.57,3736.01 3339.06,3736.01 L1.1@3470.05,3605.02
  Bottom Layer w10: +5V.1 1790,2257.07 1826.23,2293.3 1826.23,2528.01 ; v1(1886.04,3741.24) 1740.75,3595.95 1740.75,2613.49 1826.23,2528.01 ; R3.2 1910,2576.94 1875.16,2576.94 1826.23,2528.01
pads on no net: GPS.5 JP3. JP4. U11.1 U11.4 U12.7 U12.11 U12.13 U12.15 U12.16 U12.18 U12.19 U12.21 U12.22 U12.23 U12.24 U12.26 U12.27 U12.28 U12.29 U12.31 U12.36 U12.155

## Polygon pours and split planes (outlines as drawn)
GND on Bottom Layer (solid): 1520,4250 5055,4250 5190,4250 5195,1595 5200,1500 1515,1500 1500,1515 1500,1555
GND on Top Layer (solid): 1600,4160 1600,1680 1590,1670 5115,1670 5125,1680 5125,4140 5110,4155

## Keep-outs
Keep-Out Layer:
  lines w10: 1721.89,1956.5 ccw(c1840,1956.5) 1840,1838.39 ; 1721.89,3925 cw(c1840,3925) 1840,4043.11 ; 4950.23,1838.39 ccw(c4950.23,1956.5) 5068.34,1956.5 ; 4950.23,4043.11 cw(c4950.23,3925) 5068.34,3925

## Silkscreen, mask and mechanical layers (free items; w line width, h text height)
Top Overlay:
  text "Hujer.Net © 2021" at 5010,3600 h50 r92
  text "+12V" at 2350,3330 h60 r90
  text "+" at 4063.79,2301.95 h60 r225
  text "RPi indi_asi_power  PCB V1.0b" at 5010,2025 h40 r90

## Text inside footprints (layer, text, board x,y; h text height)
B1: Top Overlay "+" at 3976.82,2957.32 h50 r315
JP3: Bottom Overlay "AV-8.4-5" at 3350,2172.09 h39.37
JP4: Bottom Overlay "AV-8.4-5" at 3875,2162.09 h39.37
U12: Bottom Overlay "1" at 2057.32,3777.62 h30; Bottom Overlay "39" at 3966.84,3777.63 h30 r2; Bottom Overlay "11" at 2534.32,3792.62 h30 r270; Bottom Overlay "21" at 3061.32,3777.62 h30; Bottom Overlay "31" at 3553.32,3777.62 h30